# Altium PCB SWD Breakout.PcbDoc
Units mil, origin at the board's own origin, x right, y up, seen from the top; angles counter-clockwise.
Board outline 600 x 400 mil, 2 copper layers (Top Layer, Bottom Layer), stack 61.756 mil thick; 4 components, 8 nets, 17 pads, 0 vias.
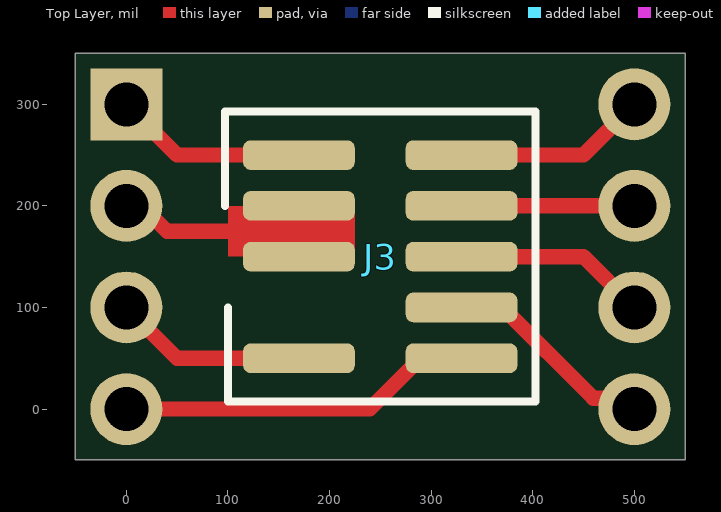
[diagram p0: Top Layer view]
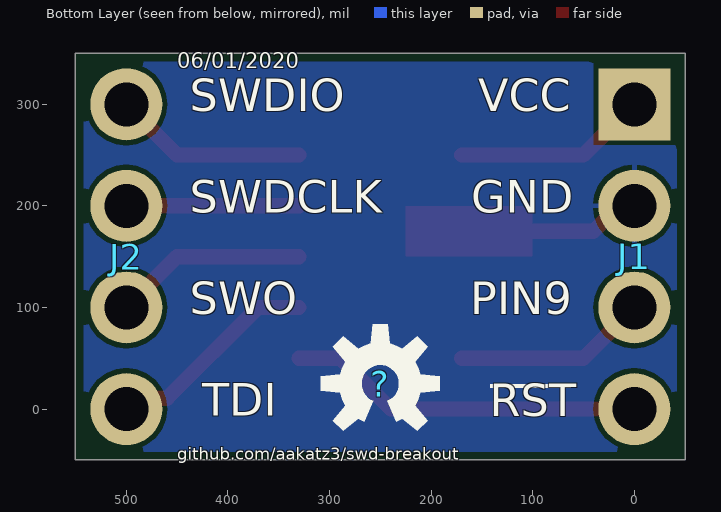
[diagram p1: Bottom Layer view, seen from below]

## Layer stack, top to bottom
Top Solder: solder mask 1, PSR-4000BN, Dk 4.5
Top Layer: signal copper 1.378
Dielectric 1: core 59, Kingboard KB6167F, Dk 4.5
Bottom Layer: signal copper 1.378
Bottom Solder: solder mask 1, PSR-4000BN, Dk 4.5

## Board outline
-50,350 -50,-50 550,-50 550,350

## Design rules (kind name [scope] priority, off if disabled: settings)
BoardOutlineClearance [All] p1: gap=7.87 ignorepadtopadclearanceinfootprint=FALSE
Clearance [All] p1: gap=5 ignorepadtopadclearanceinfootprint=FALSE except(9.84: Arc-Hole Track-Hole SMDPad-Hole THPad-Hole Via-Hole Fill-Hole Poly-Hole Region-Hole Text-Hole)
ComponentClearance [All] p1: gap=5 collisioncheckmode=3 verticalgap=5 showdistances=TRUE
DiffPairsRouting [All] p1: maxlimit=10 minlimit=5 mostfreqgap=5 toplayer_minwidth=5 toplayer_maxwidth=1000 toplayer_prefwidth=5 bottomlayer_minwidth=5 bottomlayer_maxwidth=1000 bottomlayer_prefwidth=5 maxuncoupledlength=500
Height [All] p1: minheight=0 maxheight=71497.94 prefheight=500
HoleSize [All] p1: absolutevalues=TRUE maxlimit=248.03 minlimit=11.81 maxpercent=80.000 minpercent=20.000
HoleToHoleClearance [All] p1: gap=9.84 allowstackedmicrovias=FALSE
MinimumAnnularRing [All] p1: minimumring=3
MinimumSolderMaskSliver [All] p1: minsoldermaskwidth=0
PlaneClearance [All] p1: clearance=5
PlaneConnect PlaneConnectPowerPads [InPadClass('PowerPads')] p1: planeconnectstyle=Direct reliefexpansion=20 reliefentries=4 reliefconductorwidth=10 reliefairgap=10
PlaneConnect [All] p2: pad.planeconnectstyle=Relief pad.reliefexpansion=11.81 pad.reliefentries=4 pad.reliefconductorwidth=5 pad.reliefairgap=5 via.planeconnectstyle=Direct via.reliefexpansion=11.81 via.reliefentries=4 via.reliefconductorwidth=5 via.reliefairgap=5
PolygonConnect PolygonConnectPowerPads [All vs (InPadClass('PowerPads'))] p1: connectstyle=Direct reliefconductorwidth=10 reliefentries=4 polygonreliefangle="90 Angle" airgapwidth=10
PolygonConnect [All] p2: thpad.connectstyle=Relief thpad.reliefconductorwidth=5 thpad.reliefentries=4 thpad.polygonreliefangle="90 Angle" thpad.airgapwidth=5 smdpad.connectstyle=Relief smdpad.reliefconductorwidth=5 smdpad.reliefentries=4 smdpad.polygonreliefangle="90 Angle" smdpad.airgapwidth=5 via.connectstyle=Direct via.reliefconductorwidth=5 via.reliefentries=4 via.polygonreliefangle="90 Angle" via.airgapwidth=5
RoutingVias [All] p1: holewidth=11.81 width=23.62 viastyle="Through Hole" minholewidth=11.81 minwidth=23.62 maxholewidth=23.62 maxwidth=259.84
SilkToSilkClearance [All] p1: silktosilkclearance=0
SilkToSolderMaskClearance [IsPad] p1: minsilkscreentomaskgap=5 clearancetoexposedcopper=TRUE
SolderMaskExpansion [All] p1: expansion=2.95 istentingtop=FALSE
Width [All] p1: maxlimit=1000 minlimit=5 preferedwidth=5 minimp=50.000000 maximp=50.000000 favimp=50.000000
20 further rules are at their usual default settings.

## Classes and differential pairs
component class "SWD Breakout": J1 J2 J3

## Components (designator, comment, footprint, x,y, rotation, side; value= is the part's Value field where it differs from the comment)
? "Comment" OSHW-LOGO-S 250,25 r180 bottom
J1 "4 contacts Male header" 61300411121#1 0,300 r270 bottom locked
J2 "4 contacts Male header" 61300411121#2 500,300 r270 bottom locked
J3 "Cortex Debug, 0.050\" 10 Pin" "FTSH-105-01-F-DV-007-K PLUGIN" 250,150 r270 top locked

## Footprints (in the part's own frame and the unit in brackets; to place one, negate y for a bottom-side part, rotate by r counter-clockwise, add the part's x,y. Pads: shape width x height; smd on the part's side, far side on the other; paste and mask are expansions set on the pad)
61300411121#1 [mm]
  rect 1.8x1.8 hole 1.1: 1(0,0)
  round 1.8 hole 1.1: 2(2.54,0) 3(5.08,0) 4(7.62,0)
  body extent -1.27,-1.27 8.89,1.27, height 8.54
61300411121#2 [mm]
  round 1.8 hole 1.1: 1(0,0) 2(2.54,0) 3(5.08,0) 4(7.62,0)
  body extent -1.27,-1.27 8.89,1.27, height 8.54
"FTSH-105-01-F-DV-007-K PLUGIN" [mil]
  rrect50% 29.13x109.84 smd: 1(-100,-80) 2(-100,80) 3(-50,-80) 4(-50,80) 5(0,-80) 6(0,80) 8(50,80) 9(100,-80) 10(100,80)
  silkscreen extent -143,-153 143,153, body extent -207,-310 208,115, height 315
OSHW-LOGO-S [mil]
  silkscreen extent -59,-47 59,59

## Part data
J1 J2: library part 61300411121, "Connector Male Header 1X4 vertical 4contacts 0.100in pitch 30uin Gold finish TH", Manufacturer="Würth Elektronik", ComponentLink1Description="Manufacturer Website", ComponentLink1URL=https://www.we-online.com/web/en/wuerth_elektronik/start.php, ComponentLink2Description="Component Datasheet", ComponentLink2URL=https://www.we-online.de/katalog/datasheet/6130xx11121.pdf, ComponentLink3Description="Octopart Link", ComponentLink3URL=https://octopart.com/61300411121-w%C3%BCrth+elektronik-32855522?r=sp, Contact Finish=Gold, Description in Visual="Con Hdr Male 4contacts vertical 1X4", Gender=Male, Manufacturer P/N=61300411121, Number of Contacts=4, Number of Rows=1.00, Orientation=vertical, P/N=61300411121, Pitch=0.100in
J3: library part "ARM Cortex Debug", "10 Pin Shrouded Header, 0.050\", Key Pin 7", Manufacturer=Samtech, Manufacturer P/N=Various, Supplier Part Number 1=SAM15640-ND, ComponentLink1Description="Pinout Reference", ComponentLink1URL=http://infocenter.arm.com/help/topic/com.arm.doc.faqs/attached/13634/cortex_debug_connectors.pdf, ComponentLink2Description="Datasheet for Connector", ComponentLink2URL=http://suddendocs.samtec.com/catalog_english/ftsh_smt.pdf, Contact Finish=Gold, Description in Visual="10 Pin Shrouded Header, 0.050\", Key Pin 7", Gender=Male, Number of Contacts=10, Number of Rows=2, Orientation=Vertical, P/N="ARM Cortex Debug", Pitch="0.050\"", Supplier 1=Digi-Key, Supplier 2=Digi-Key, Supplier 3=Digi-Key, Supplier Part Number 2=SAM13926CT-ND, Supplier Part Number 3=SAM11250-ND

## Nets (pads, with @x,y where several pads share a name; then routed paths per layer and width w, separated by ;. In a path a pad name is that pad's centre, name@x,y a point inside that pad or via, vN(x,y) a via of type N, cw(c..) or ccw(c..) an arc to the next point about the centre after c; other vN are vias at no path point)
\RST: J1.4 J3.10 | length 350.7
  Top Layer w15: J1.4 239.65,0 289.65,50 J3.10
GND: J1.2 J3.3 J3.5 | length 185.4
  Top Layer w15: J1.2 15.12,200 40.12,175 175,175
P9: J1.3 J3.9 | length 190.7
  Top Layer w15: J1.3 50,50 J3.9
SWDCLK: J2.2 J3.4 | length 170
  Top Layer w15: J3.4 J2.2
SWDIO: J2.1 J3.2 | length 190.7
  Top Layer w15: J3.2 450,250 J2.1
SWO: J2.3 J3.6 | length 190.7
  Top Layer w15: J3.6 450,150 J2.3
TDI: J2.4 J3.8 | length 211.4
  Top Layer w15: J3.8 370.35,100 459.67,10.69 489.31,10.69 J2.4
VCC: J1.1 J3.1 | length 190.7
  Top Layer w15: J1.1 50,250 J3.1

## Polygon pours and split planes (outlines as drawn)
GND on Bottom Layer "GND_L02_P000" (solid, pour order 0): -50,350 -50,-50 550,-50 550,350

## Other copper
Top Layer:
  rectangle net GND: 100,150 225,200

## Silkscreen, mask and mechanical layers (free items; w line width, h text height)
Bottom Overlay:
  rectangle: 62.5,20.5 142,24.5
  text "06/01/2020" at 450,330 h26
  text "VCC" at 153.64,282.28 h55
  text "SWDIO" at 437.5,282.28 h55
  text "GND" at 160.26,182.32 h55
  text "SWDCLK" at 437.5,182.28 h55
  text "PIN9" at 161.37,82.61 h55
  text "SWO" at 437.5,82.28 h55
  text "TDI" at 425,-17.26 h55
  text "RST" at 142.01,-17.72 h55
  text "github.com/aakatz3/swd-breakout" at 450,-50 h12
Board Outline:
  the board outline again, w1
CAM Title Block:
  drawing of 59 lines, arcs and shapes, not listed
  text "1" at -3264.29,2661.6 h48.36
  text "2" at -521.17,2661.6 h48.36
  text "3" at 2231.96,2661.6 h48.36
  text "4" at 4977.58,2661.6 h48.36
  text "A" at -4537.46,1699.46 h48.36
  text "A" at 6263.26,1699.46 h48.36
  text "B" at -4532.46,-425.75 h48.36
  text "B" at 6267.43,-425.75 h48.36
  text "C" at -4533.3,-2550.12 h48.36
  text "C" at 6266.6,-2550.12 h48.36
  text "D" at -4535.8,-4675.33 h48.36
  text "D" at 6264.1,-4675.33 h48.36
  text "Title:" at 2674.69,-4756.2 h65.87
  text "'.Pcb_File_Name_No_Path'" at 3024.88,-4777.32 h63.36
  text "*" at 2924.83,-4870.42 h32.52
  text "*" at 2924.83,-4930.45 h32.52
  text "Desc:" at 2674.69,-4942.96 h42.52
  text "*" at 2924.83,-4990.48 h32.52
  text "Letter" at 2874.8,-5138.06 h42.52
  text "Auth:" at 3275.01,-5138.06 h42.52
  text "Proj:" at 4374.76,-5138.06 h42.52
  text "Size:" at 2674.69,-5143.06 h42.52
  text ".ProjAuth" at 3524.65,-5160 h42.52
  text ".ProjShrtName" at 4575,-5160 h42.52
  text "1" at 4674.92,-5277.71 h37.52
  text "1" at 4975.08,-5277.71 h37.52
  text "Date:" at 2674.69,-5283.96 h37.52
  text "'.ModifiedDate'" at 2924.83,-5283.96 h37.52
  text "Time:" at 3675.22,-5283.96 h37.52
  text "'.ModifiedTime'" at 3885.34,-5283.96 h37.52
  text "Sheet" at 4374.76,-5283.96 h37.52
  text "of" at 4825,-5283.96 h37.52
  text "Repo:" at 2674.69,-5374 h37.52
  text ".ProjGitURL" at 2925,-5375 h37.52
  text "File:" at 2674.69,-5474.05 h37.52
  text "'.Pcb_File_Name'" at 2924.83,-5474.05 h37.52
  text "1" at -3264.29,-5637.47 h48.36
  text "2" at -521.17,-5637.47 h48.36
  text "3" at 2231.96,-5637.47 h48.36
  text "4" at 4977.58,-5637.47 h48.36